# EAGLE board L293D Motor Driver-Board (EAGLE 9.6.2)
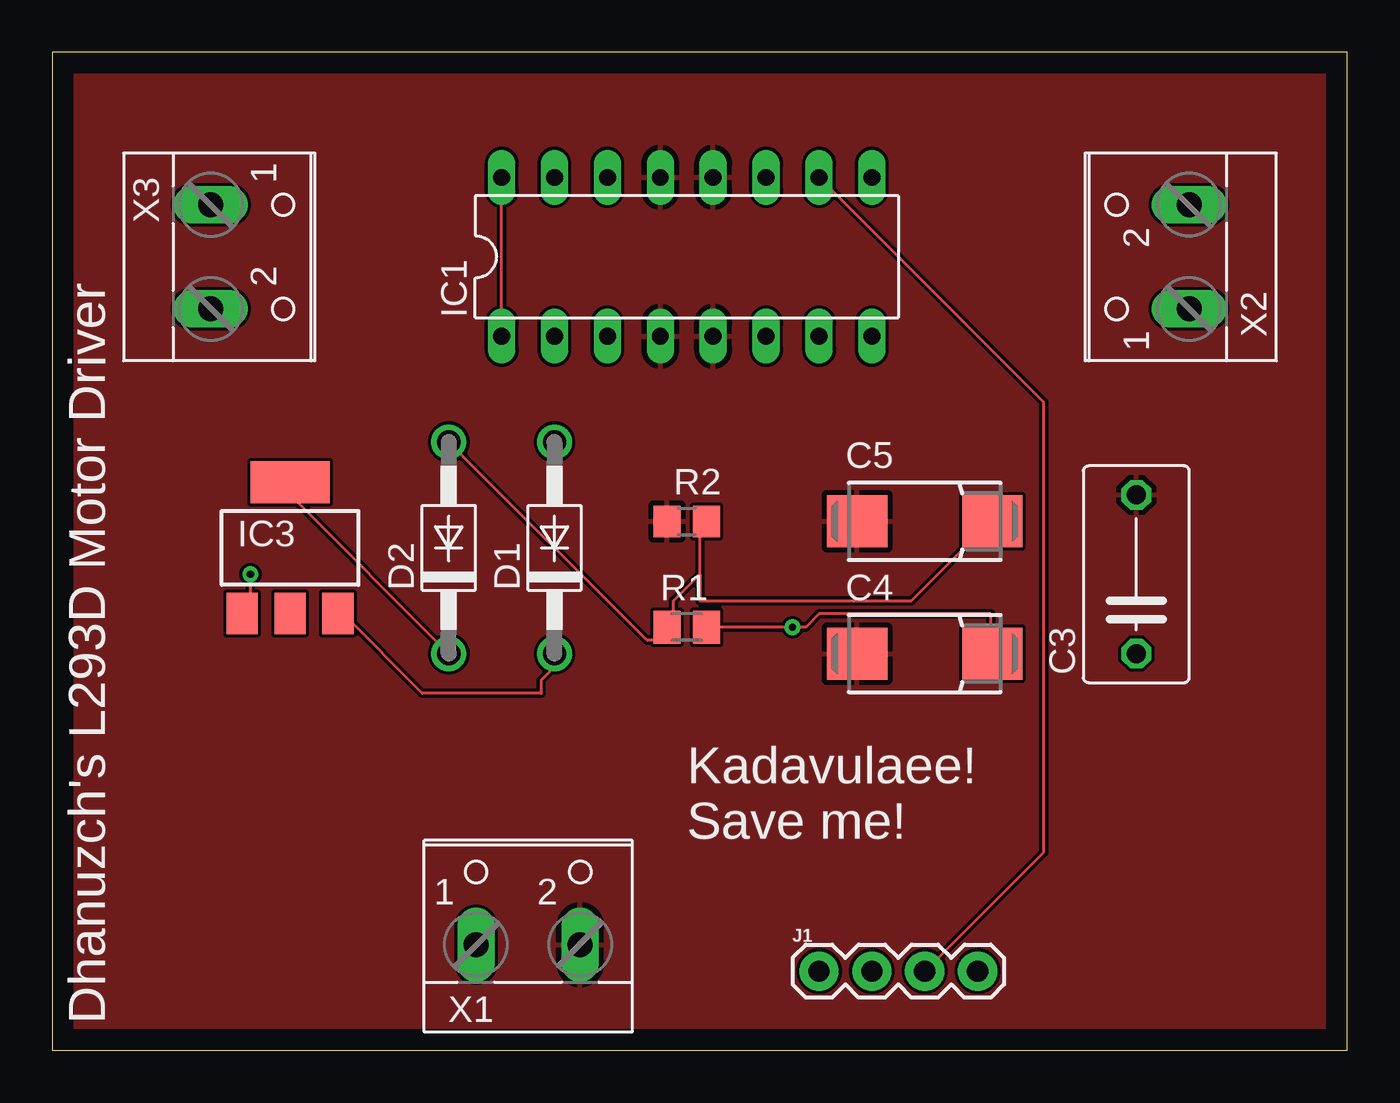
[diagram p0: board, top side]
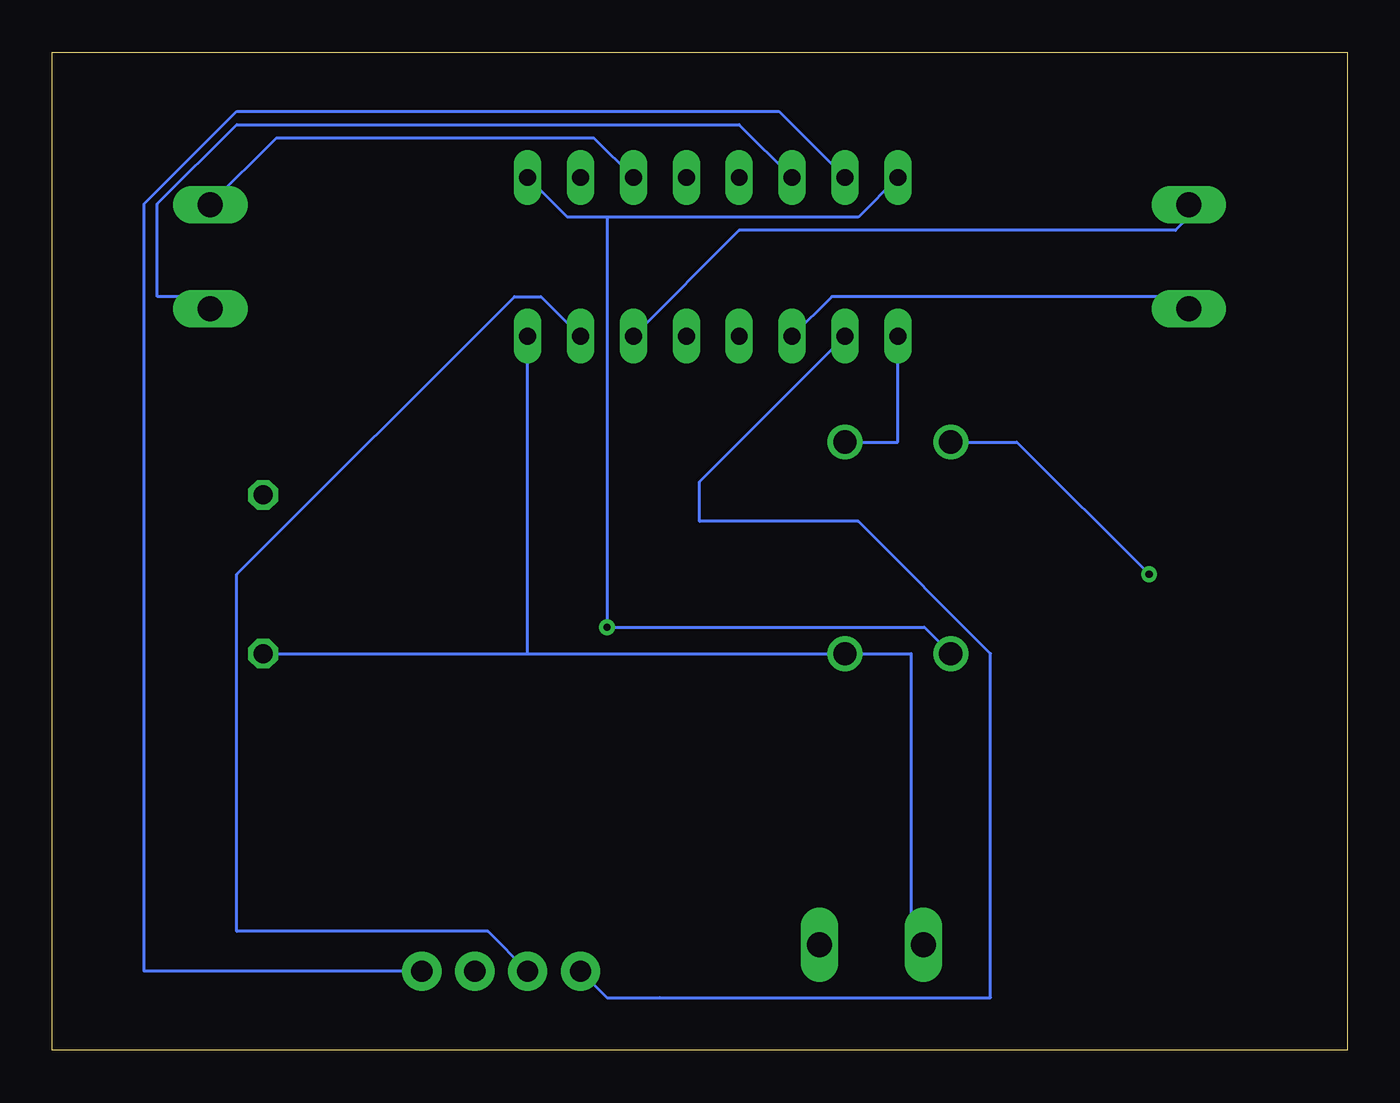
[diagram p1: board, bottom side, seen from below]

Size 62.21 x 47.93 mm. Coordinates in mm from the lower left corner, seen from the top.
Outline: 0,0 62.21,0 62.21,47.93 0,47.93 0,0
Copper layers (1*16): Top 0.035mm / dielectric 1.5mm / Bottom 0.035mm
Design rules "default": minimum track width 6mil, minimum drill 0.35mm, track to track 6mil, track to pad 6mil, pad to pad 6mil, via to via 6mil, smd to smd 6mil, copper to edge 40mil, drill to drill 6mil, minimum pad ring 10mil, minimum via ring 8mil, stop-mask expansion 4mil, vias tented up to drill 0mil, thermal gap 10mil

## Footprints (pad centres in the part's own frame; a part is rotated, then mirrored left to right if it is on the bottom)
C075-052X106 = drill 0.914 octagon: 1 -3.81,0; 2 3.81,0
085CS_1AR = smd 2.9 x 2.5: + 3.25,0; - -3.25,0
DO41-10 = drill 1.118: A 5.08,0; C -5.08,0
DIL16 = drill 0.813 long: 1 -8.89,-3.81; 2 -6.35,-3.81; 3 -3.81,-3.81; 4 -1.27,-3.81; 5 1.27,-3.81; 6 3.81,-3.81; 7 6.35,-3.81; 8 8.89,-3.81; 9 8.89,3.81; 10 6.35,3.81; 11 3.81,3.81; 12 1.27,3.81; 13 -1.27,3.81; 14 -3.81,3.81; 15 -6.35,3.81; 16 -8.89,3.81
SOT223 = smd 1.5 x 2: 1 -2.3,-3.15; 2 0,-3.15; 3 2.3,-3.15 | smd 3.8 x 2: 4 0,3.15
1X04 = drill 1.016 pad 1.88: 1 0,0; 2 2.54,0; 3 5.08,0; 4 7.62,0
M0805 = smd 1.3 x 1.6: 1 -0.95,0; 2 0.95,0
R0805 = smd 1.3 x 1.5: 1 -0.95,0; 2 0.95,0
W237-102 = drill 1.194 long: 1 -2.5,-1.27; 2 2.5,-1.27

## Placement (x,y rotation side)
C3  0.1uF  [C075-052X106]  52.07,22.86 90 top
C4  1uF  [085CS_1AR]  41.91,19.05 0 top
C5  10uF  [085CS_1AR]  41.91,25.4 0 top
D1  1N4002  [DO41-10]  24.13,24.13 90 top
D2  1N4002  [DO41-10]  19.05,24.13 90 top
IC1  L293D  [DIL16]  30.48,38.1 0 top
IC3  LM317MBSTT3  [SOT223]  11.43,24.13 0 top
J1  [1X04]  36.83,3.81 0 top
R1  240Ω  [M0805]  30.48,20.32 0 top
R2  [R0805]  30.48,25.4 0 top
X1  [W237-102]  22.86,6.35 0 top
X2  [W237-102]  53.34,38.1 90 top
X3  [W237-102]  8.89,38.1 270 top

## Library data of the parts
C3 = rcl
C4 C5 R1 = resistor
D1 D2 = diode
IC1 = st-microelectronics; MPN: L293D; OC_FARNELL: 9589619; OC_NEWARK: 56P8249
IC3 = v-reg; PARTNUMBER: LM317M
J1 = SparkFun-Connectors; PROD_ID: CONN-09696
R2 = designblock
X1-X3 = con-wago-500; MPN: 237-102; OC_FARNELL: unknown; OC_NEWARK: 70K9898

## Nets
GND: C3.2 C4.- C5.- IC1.4 IC1.5 IC1.12 IC1.13 R2.1 X1.2
N$1: C5.+ D2.A IC3.1 R1.1 R2.2
N$2: IC1.15 J1.4
N$3: IC1.10 J1.3
N$4: IC1.14 X2.1
N$5: IC1.11 X2.2
N$6: IC1.3 X3.2
N$7: IC1.6 X3.1
N$8: IC1.7 J1.2
N$9: IC1.2 J1.1
VIN: C3.1 D1.C IC1.8 IC3.3 X1.1
VO: C4.+ D1.A D2.C IC1.1 IC1.9 IC1.16 IC3.4 R1.2

## Tracks (layer width: path | path; a pad name or v marks a point on that pad's centre or on a via)
GND
  pour Top: 0,48.26 63.5,48.26 63.5,-1.27 0,-1.27 -1.27,-2.54 -1.27,48.26
N$1  (via drill 0.35)
  Top 0.152: v9.53,22.86 9.53,21.59 IC3.1 | 31.11,22.86 31.11,25.4 R2.2 | 31.11,22.86 29.84,21.59 29.84,20.32 R1.1 29.21,20.32 29.21,19.68 28.57,19.68 D2.A | 31.11,22.86 31.11,21.59 41.27,21.59 45.09,25.4 C5.+
  Bottom 0.152: v9.53,22.86 15.88,29.21 D2.A
N$2
  Bottom 0.152: IC1.15 27.3,45.09 53.34,45.09 57.78,40.64 57.78,3.81 J1.4
N$3
  Top 0.152: IC1.10 47.62,31.11 47.62,9.53 J1.3
N$4
  Bottom 0.152: IC1.14 29.21,44.45 53.34,44.45 57.15,40.64 57.15,36.2 54.61,36.2 X2.1
N$5
  Bottom 0.152: IC1.11 36.2,43.81 51.44,43.81 54.61,40.64 X2.2
N$6
  Bottom 0.152: IC1.3 24.77,36.2 7.62,36.2 X3.2
N$7
  Bottom 0.152: IC1.6 29.21,39.37 8.26,39.37 7.62,40.01 X3.1
N$8
  Bottom 0.152: IC1.7 38.73,36.2 40.01,36.2 53.34,22.86 53.34,5.71 41.27,5.71 J1.2
N$9
  Bottom 0.152: IC1.2 31.11,27.3 31.11,25.4 23.5,25.4 17.14,19.05 17.14,2.54 33.02,2.54 35.56,2.54 J1.1
VIN
  Top 0.152: D1.C 24.13,18.41 23.5,17.78 23.5,17.14 17.78,17.14 13.97,20.95 IC3.3
  Bottom 0.152: X1.1 20.95,5.08 20.95,19.05 D1.C 39.37,19.05 | 39.37,19.05 IC1.8 | C3.1 39.37,19.05
VO  (via drill 0.35)
  Top 0.152: D2.C 11.43,26.67 IC3.4 | R1.2 v35.56,20.32 36.2,20.32 36.83,20.95 45.09,20.95 45.09,19.05 C4.+ | IC1.1 IC1.16
  Bottom 0.152: IC1.1 21.59,29.21 D1.A | IC1.9 37.47,40.01 35.56,40.01 | 35.56,40.01 23.5,40.01 IC1.16 | 35.56,40.01 v35.56,20.32 20.32,20.32 D2.C

## Text on the board
tPlace: Kadavulaee! / Save me! | Dhanuzch's L293D Motor Driver